# Altium PCB sai_arduinoPinMap.PcbDoc
Units mm, origin at the board's own origin, x right, y up, seen from the top; angles counter-clockwise.
Board outline 152.4 x 101.6 mm, 2 copper layers (Top Layer, Bottom Layer); 34 components, 37 nets, 136 pads, 15 vias.
Unrouted connection lines stored in the file: 1.
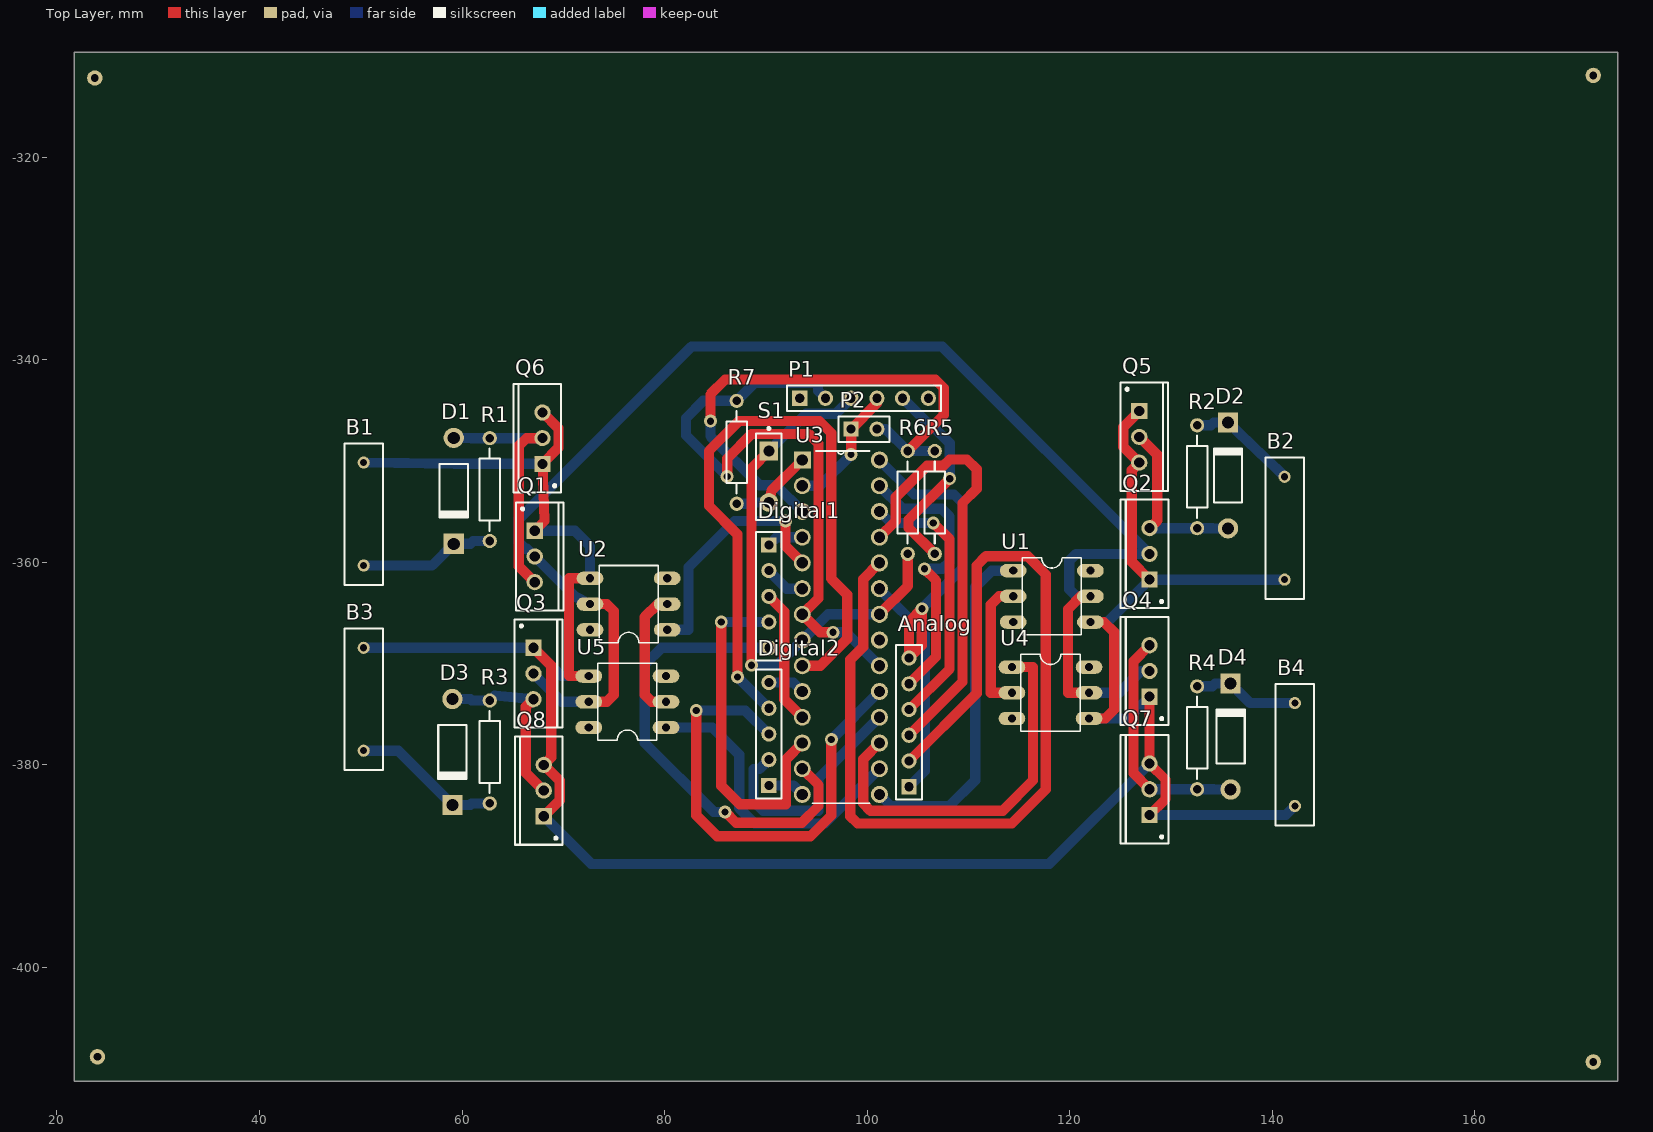
[diagram p0: Top Layer view]
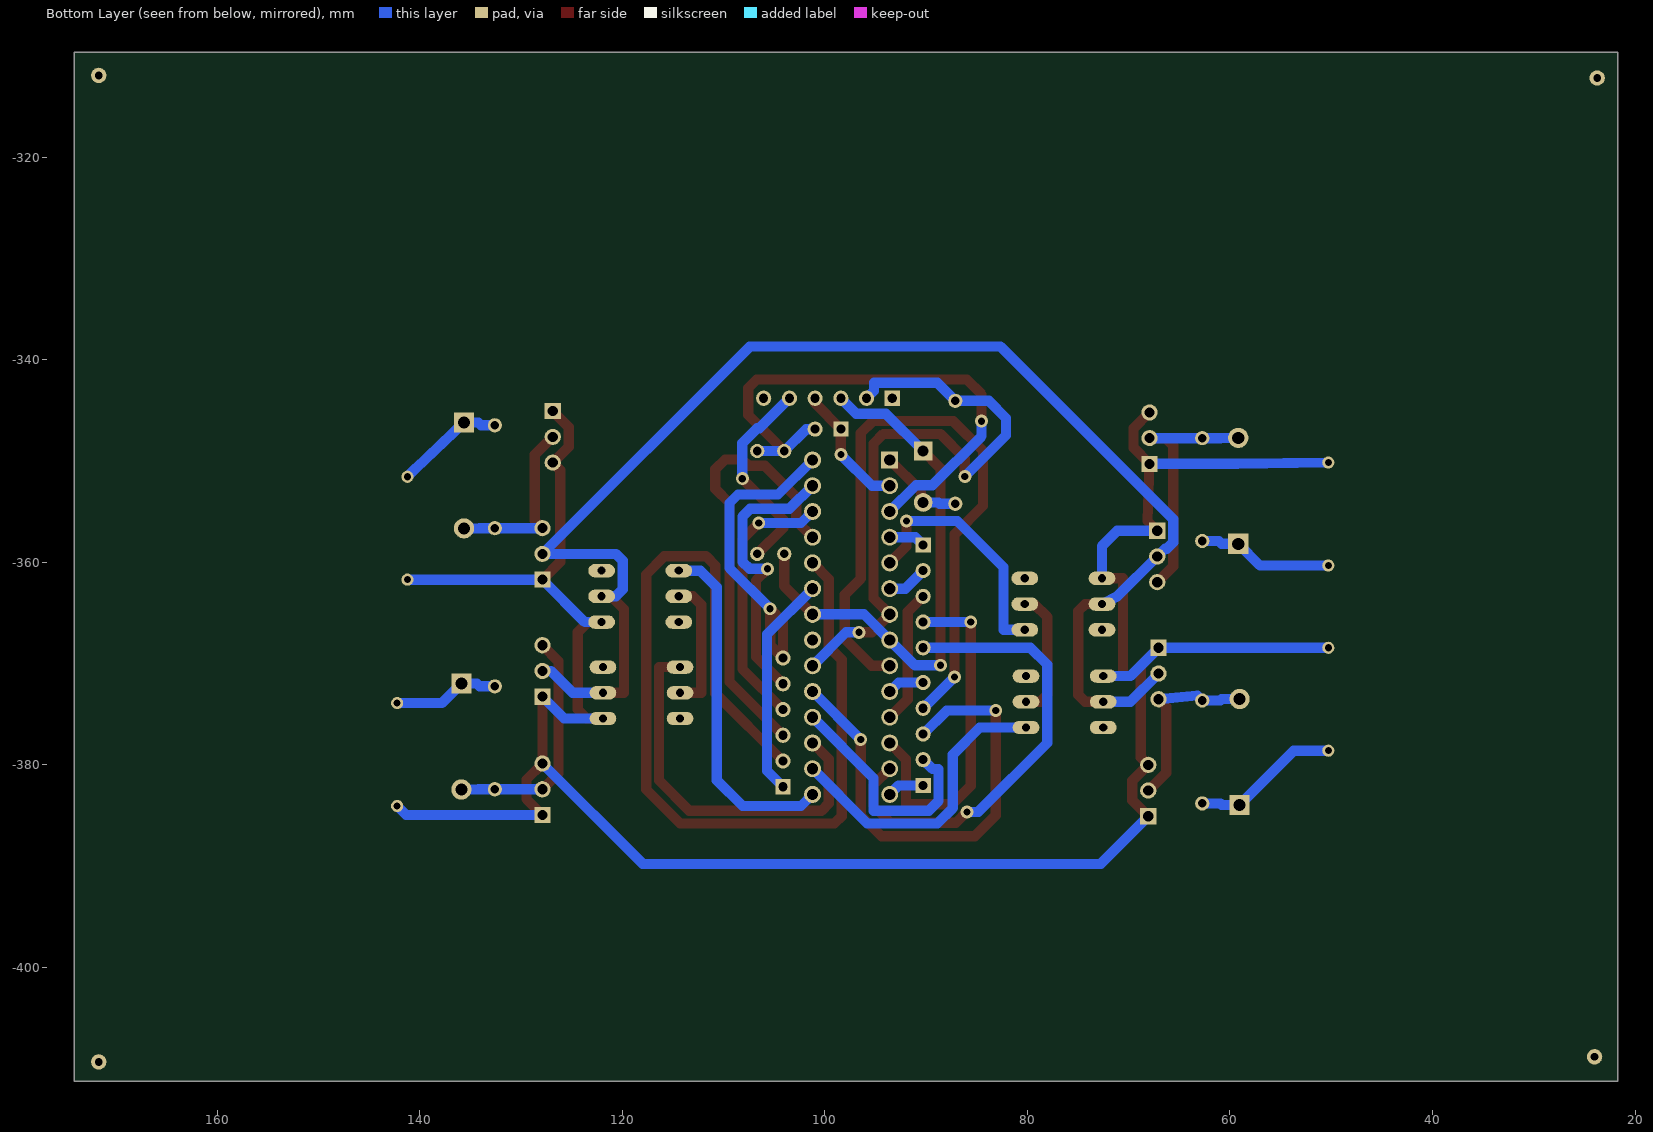
[diagram p1: Bottom Layer view, seen from below]

## Layer stack, top to bottom
Top Solder: solder mask 0.0102, Solder Resist, Dk 3.5
Top Layer: signal copper 0.0356
Dielectric 1: dielectric 0.32, FR-4, Dk 4.8
Bottom Layer: signal copper 0.0356
Bottom Solder: solder mask 0.0102, Solder Resist, Dk 3.5

## Board outline
21.717,-411.226 174.117,-411.226 174.117,-309.626 21.717,-309.626

## Design rules (kind name [scope] priority, off if disabled: settings)
Clearance [All] p1: gap=0.254 ignorepadtopadclearanceinfootprint=FALSE except(0: Arc-Hole Track-Hole SMDPad-Hole THPad-Hole Via-Hole Fill-Hole Poly-Hole Region-Hole Text-Hole)
DiffPairsRouting [All] p1: maxlimit=1 minlimit=0.5 mostfreqgap=0.75 toplayer_minwidth=1 toplayer_maxwidth=2 toplayer_prefwidth=2 bottomlayer_minwidth=1 bottomlayer_maxwidth=2 bottomlayer_prefwidth=2 maxuncoupledlength=12.7
PolygonConnect [All] p1: connectstyle=Relief reliefconductorwidth=0.254 reliefentries=4 polygonreliefangle="90 Angle" airgapwidth=0.254
RoutingVias [All] p1: holewidth=0.711 width=1.27 viastyle="Through Hole" minholewidth=0.711 minwidth=1.27 maxholewidth=0.711 maxwidth=1.27
SolderMaskExpansion [All] p1: expansion=0.102
Width [All] p1: maxlimit=1.016 minlimit=1.016 preferedwidth=1.016
29 further rules are at their usual default settings.

## Components (designator, comment, footprint, x,y, rotation, side; value= is the part's Value field where it differs from the comment)
Analog "Header 6" HDR1X6 104.14,-382.143 r90 top
B1 "Motor Servo" RAD-0.4 50.292,-355.219 r90 top
B2 "Motor Servo" RAD-0.4 141.224,-356.616 r90 top
B3 "Motor Servo" RAD-0.4 50.292,-373.507 r270 top
B4 "Motor Servo" RAD-0.4 142.24,-378.968 r270 top
D1 "Diode 1N4007" DO-41 59.182,-352.933 r270 top
D2 "Diode 1N4007" DO-41 135.636,-351.409 r90 top
D3 "Diode 1N4007" DO-41 59.055,-378.714 r270 top
D4 "Diode 1N4007" DO-41 135.89,-377.19 r90 top
Digital1 "Header 5" HDR1X5 90.297,-358.267 r270 top
Digital2 "Header 5" HDR1X5 90.297,-382.016 r90 top
P1 "Header 6" HDR1X6 93.345,-343.789 r0 top
P2 "Header 2" HDR1X2 98.425,-346.837 r0 top
Q1 "PMOS-2" TO-220AB 67.183,-359.41 r270 top
Q2 "PMOS-2" TO-220AB 127.889,-359.156 r90 top
Q3 "PMOS-2" TO-220AB 67.056,-370.967 r270 top
Q4 "PMOS-2" TO-220AB 127.889,-370.713 r90 top
Q5 "NMOS-2" TO-220AB 126.873,-347.599 r270 top
Q6 "NMOS-2" TO-220AB 67.945,-347.726 r90 top
Q7 "NMOS-2" TO-220AB 127.889,-382.397 r90 top
Q8 "NMOS-2" TO-220AB 68.072,-382.524 r90 top
R1 "Res2" AXIAL-0.4 62.738,-352.806 r90 top value=1K
R2 "Res2" AXIAL-0.4 132.588,-351.536 r90 top value=1K
R3 "Res2" AXIAL-0.4 62.738,-378.714 r90 top value=1K
R4 "Res2" AXIAL-0.4 132.588,-377.317 r90 top value=1K
R5 "Res2" AXIAL-0.4 106.68,-354.076 r270 top value=1K
R6 "Res2" AXIAL-0.4 104.013,-354.076 r90 top
R7 "Res2" AXIAL-0.4 87.122,-349.123 r90 top value=1K
S1 "SW-PB" SPST-2 90.297,-351.536 r270 top
U1 "4N35" *DIL06 118.237,-363.347 r270 top
U2 "4N35" *DIL06 76.454,-364.109 r90 top
U3 "ATMEGA328P-PU" *DIP254P762X457-28 101.219,-382.905 r0 top
U4 "4N35" *DIL06 118.11,-372.872 r270 top
U5 "4N35" *DIL06 76.327,-373.761 r90 top

## Footprints (in the part's own frame and the unit in brackets; to place one, negate y for a bottom-side part, rotate by r counter-clockwise, add the part's x,y. Pads: shape width x height; smd on the part's side, far side on the other; paste and mask are expansions set on the pad)
*DIL06 [mil]
  oval 52x104 hole 32: 1(-100,-150) 2(0,-150) 3(100,-150) 4(100,150) 5(0,150) 6(-100,150)
  silkscreen extent -150,-115 150,115
*DIP254P762X457-28 [mil]
  rect 66x66 hole 44: 1(-300,1300)
  round 66 hole 44: 2(-300,1200) 3(-300,1100) 4(-300,1000) 5(-300,900) 6(-300,800) 7(-300,700) 8(-300,600) 9(-300,500) 10(-300,400) 11(-300,300) 12(-300,200) 13(-300,100) 14(-300,0) 15(0,0) 16(0,100) 17(0,200) 18(0,300) 19(0,400) 20(0,500) 21(0,600) 22(0,700) 23(0,800) 24(0,900) 25(0,1000) 26(0,1100) 27(0,1200) 28(0,1300)
  silkscreen extent -262,-35 -38,1335
AXIAL-0.4 [mm] "Axial Device, Thru-Hole; 2 Leads; 0.4 in Pin Spacing"
  round 1.4 hole 0.85: 1(-5.08,0) 2(5.08,0)
  silkscreen extent -4.06,-1.02 4.06,1.02
DO-41 [mm] "Diode, Axial; Body 5.2 x 2.7 mm (LxDia. max), Lead Dia. 0.86 mm (max)"
  round 2 hole 1.2: 1(-5.23,0)
  rect 2x2 hole 1.2: 2(5.23,0)
  silkscreen extent -2.65,-1.4 2.75,1.4
HDR1X2 [mm] "Connector; Header; 2 Position"
  rect 1.5x1.5 hole 0.9: 1(0,0)
  round 1.5 hole 0.9: 2(2.54,0)
  silkscreen extent -1.27,-1.27 3.81,1.27
HDR1X5 [mm] "Connector; Header; 5 Position"
  rect 1.5x1.5 hole 0.9: 1(0,0)
  round 1.5 hole 0.9: 2(2.54,0) 3(5.08,0) 4(7.62,0) 5(10.16,0)
  silkscreen extent -1.27,-1.27 11.43,1.27
HDR1X6 [mm] "Connector; Header; 6 Position"
  rect 1.5x1.5 hole 0.9: 1(0,0)
  round 1.5 hole 0.9: 2(2.54,0) 3(5.08,0) 4(7.62,0) 5(10.16,0) 6(12.7,0)
  silkscreen extent -1.27,-1.27 13.97,1.27
RAD-0.4 [mm] "Radial Cap, Thru-Hole; 2 Leads; 0.4 in Pin Spacing"
  round 1.2 hole 0.7: 1(-5.08,0) 2(5.08,0)
  silkscreen extent -6.98,-1.91 6.98,1.91
SPST-2 [mm] "Switch; 2 Leads"
  rect 1.85x1.85 hole 1.1: 1(-2.54,0)
  round 1.85 hole 1.1: 2(2.54,0)
  silkscreen extent -4.89,-1.27 4.28,1.27
TO-220AB [mm] "TO, Thru-Hole, Vertical, Heatsink Mounted; 3 In-Line Leads; Pitch 2.54 mm"
  rect 1.6x1.6 hole 1: 1(-2.54,0)
  round 1.6 hole 1: 2(0,0) 3(2.54,0)
  silkscreen extent -5.35,-1.85 5.35,2.85, body extent -5.4,-1.9 5.4,2.9, height 19.3

## Part data
Analog P1: "Header, 6-Pin", LatestRevisionDate=17-Jul-2002, LatestRevisionNote="Re-released for DXP Platform.", Publisher="Altium Limited"
B1 B2 B3 B4: "Servo Motor", LatestRevisionDate=17-Jul-2002, LatestRevisionNote="Re-released for DXP Platform.", PackageDescription="Radial Cap, Thru-Hole; 2 Leads; 0.4 in Pin Spacing", PackageReference=RAD-0.4, Published=24-Mar-1999, Publisher="Altium Limited"
D1 D2 D3 D4: "1 Amp General Purpose Rectifier", Code_JEDEC=DO-204-AL, ComponentLink1Description="Manufacturer Link", ComponentLink1URL=http://www.fairchildsemi.com/, ComponentLink2Description=Datasheet, ComponentLink2URL=http://www.fairchildsemi.com/ds/1N%2F1N4001.pdf, DatasheetVersion=1998, LatestRevisionDate=17-Jul-2002, LatestRevisionNote="Re-released for DXP Platform.", PackageDescription="Diode, Axial; Body 5.2 x 2.7 mm (LxDia. max), Lead Dia. 0.86 mm (max)", PackageReference=DO-41, PackageVersion=Aug-1999, Published=8-Jun-2000, Publisher="Altium Limited"
Digital1 Digital2: "Header, 5-Pin", LatestRevisionDate=17-Jul-2002, LatestRevisionNote="Re-released for DXP Platform.", Publisher="Altium Limited"
P2: "Header, 2-Pin", LatestRevisionDate=17-Jul-2002, LatestRevisionNote="Re-released for DXP Platform.", Publisher="Altium Limited"
Q1 Q2 Q3 Q4: "P-Channel Power MOSFET", ComponentLink1Description="Manufacturer Link", ComponentLink1URL=http://www.irf.com/, DatasheetVersion=PD-9.390D, LatestRevisionDate=17-Jul-2002, LatestRevisionNote="Re-released for DXP Platform.", Note="Pin 4 not drawn and electrically connected to Pin 2.", PackageDescription="TO, Thru-Hole, Vertical, Heatsink Mounted; 3 In-Line Leads; Pitch 2.54 mm", PackageReference=TO-220AB, PackageVersion=Feb-1997, Published=8-Jun-2000, Publisher="Altium Limited"
Q5 Q6 Q7 Q8: "N-Channel Power MOSFET", ComponentLink1Description="Manufacturer Link", ComponentLink1URL=http://www.irf.com/, DatasheetVersion=PD-9.814, LatestRevisionDate=17-Jul-2002, LatestRevisionNote="Re-released for DXP Platform.", Note="Pin 2 is electrically connected to pin 4.", PackageDescription="TO, Thru-Hole, Vertical, Heatsink Mounted; 3 In-Line Leads; Pitch 2.54 mm", PackageReference=TO-220AB, PackageVersion=Feb-1997, Published=8-Jun-2000, Publisher="Altium Limited"
R1 R2 R3 R4 R5 R6 R7: "Resistor", LatestRevisionDate=17-Jul-2002, LatestRevisionNote="Re-released for DXP Platform.", PackageDescription="Axial Device, Thru-Hole; 2 Leads; 0.4 in Pin Spacing", PackageReference=AXIAL-0.4, Published=8-Jun-2000, Publisher="Altium Limited"
S1: "Switch", LatestRevisionDate=17-Jul-2002, LatestRevisionNote="Re-released for DXP Platform.", PackageDescription="Switch; 2 Leads", PackageReference=SPST-2, Published=24-Mar-1999, Publisher="Altium Limited"
U1 U2 U4 U5: "Optoisolator; Analog; 6-Pin DIP; Transistor; 6 PIN SINGLE; 100% CTR;", Package="DIP-6 Infineon", Availability=Unavailable, MF="Vishay Semiconductor", MP=4N35, Price=None, SnapEDA_Link=https://www.snapeda.com/parts/4N35/Vishay%20Semiconductor%20Opto%20Division/view-part/?ref=snap
U3: "Embedded microcontroller ATMEGA328P-PU PDIP 28 Microchip Technology 8-Bit 20 MHz I/O number 23", Package="PDIP-28 Microchip", Availability=Unavailable, MF=Microchip, MP=ATMEGA328P-PU, Price=None, SnapEDA_Link=https://www.snapeda.com/parts/ATMEGA328P-PU/Microchip/view-part/?ref=snap

## Free pads (board coordinates)
  round 1.524 hole 0.762: 1(23.749,-312.166) 2(171.704,-311.912) 3(171.704,-409.321) 4(24.003,-408.813)

## Via types
v1: diameter 1.27, hole 0.711, Top Layer to Bottom Layer, 15 vias

## Nets (pads, with @x,y where several pads share a name; then routed paths per layer and width w, separated by ;. In a path a pad name is that pad's centre, name@x,y a point inside that pad or via, vN(x,y) a via of type N, cw(c..) or ccw(c..) an arc to the next point about the centre after c; other vN are vias at no path point)
NetAnalog_1: Analog.1 U3.23 | length 22.1
  Bottom Layer w1.016: U3.23 105.715,-367.081 105.715,-380.568 Analog.1
NetAnalog_2: Analog.2 U3.24 | length 98.5
  Top Layer w1.016: U3.24 99.619,-361.645 99.619,-368.325 98.349,-369.595 98.349,-385.064 99.06,-385.775 114.3,-385.775 117.653,-382.422 117.653,-361.188 115.849,-359.385 111.735,-359.385 110.82,-360.299 110.82,-372.923 Analog.2
NetAnalog_3: Analog.3 U3.25 | length 43.6
  Top Layer w1.016: U3.25 102.819,-355.905 102.819,-353.568 105.929,-350.458 107.529,-350.458 108.153,-349.834 109.855,-349.834 110.82,-350.799 110.82,-352.73 109.423,-354.127 109.423,-371.78 Analog.3
NetAnalog_4: Analog.4 U3.26 | length 26.5
  Top Layer w1.016: Analog.4 108.142,-370.521 108.142,-357.722 v1(106.528,-356.108)
  Bottom Layer w1.016: U3.26 102.362,-356.108 v1(106.528,-356.108)
NetAnalog_5: Analog.5 U3.27 | length 28.3
  Top Layer w1.016: Analog.5 106.807,-369.316 106.807,-361.772 v1(105.664,-360.629)
  Bottom Layer w1.016: U3.27 103.505,-354.711 107.38,-354.711 108.142,-355.473 108.142,-359.918 107.431,-360.629 v1(105.664,-360.629)
NetAnalog_6: Analog.6 U3.28 | length 32.9
  Top Layer w1.016: Analog.6 104.14,-365.836 v1(105.41,-364.566) 105.41,-368.173 Analog.6
  Bottom Layer w1.016: U3.28 104.628,-353.294 108.585,-353.294 109.423,-354.132 109.423,-360.553 v1(105.41,-364.566)
NetB1_1: B1.1 D1.2 R1.1 | length 13.4
  Bottom Layer w1.016: B1.1 57.046,-360.299 D1.2 60.808,-358.163 61.085,-357.886 R1.1
NetB1_2: B1.2 B2.1 B3.1 B4.2 Q1.1 Q2.1 Q3.1 Q4.1 Q5.1 Q5.3 Q6.1 Q6.3 Q7.1 Q7.3 Q8.1 Q8.3 U1.4 U2.4 U4.4 U5.4 | length 250
  Top Layer w1.016: Q3.1 68.821,-370.192 68.821,-379.235 Q8.3 69.647,-381.559 69.647,-383.489 Q8.1 ; Q1.1 68.148,-355.905 Q6.1 69.52,-348.691 69.52,-346.761 Q6.3 ; U5.4 70.561,-371.221 70.561,-361.569 U2.4 ; U4.4 123.52,-375.412 124.409,-374.523 124.409,-366.903 123.393,-365.887 U1.4 ; Q5.1 125.298,-346.634 125.298,-348.564 Q5.3 126.124,-350.888 126.124,-359.931 Q2.1 ; Q7.1 129.464,-383.362 129.464,-381.432 Q7.3 Q4.1
  Bottom Layer w1.016: B3.1 Q3.1 69.85,-371.221 U5.4 ; B1.2 59.258,-350.266 Q6.1 ; Q1.1 71.12,-356.87 72.644,-358.394 U2.4 ; Q8.1 72.776,-389.768 117.978,-389.768 Q7.3 ; U4.4 125.73,-375.412 Q4.1 ; U1.4 123.698,-365.887 Q2.1 B2.1 ; Q7.1 141.351,-384.937 B4.2
NetB2_2: B2.2 D2.2 R2.2 | length 10.9
  Bottom Layer w1.016: R2.2 133.96,-346.456 134.237,-346.179 D2.2 140.437,-350.749 B2.2
NetB3_2: B3.2 D3.2 R3.1 | length 14.7
  Bottom Layer w1.016: B3.2 53.698,-378.587 D3.2 60.808,-383.944 60.958,-383.794 R3.1
NetB4_1: B4.1 D4.2 R4.2 | length 10.6
  Bottom Layer w1.016: R4.2 134.087,-372.237 134.364,-371.96 D4.2 137.818,-373.888 B4.1
NetD1_1: D1.1 Q1.3 Q6.2 R1.2 | length 25.5
  Top Layer w1.016: Q1.3 65.608,-360.375 65.608,-348.488 66.37,-347.726 Q6.2
  Bottom Layer w1.016: D1.1 60.935,-347.703 60.958,-347.726 R1.2 Q6.2
NetD2_1: D2.1 Q2.3 Q5.2 R2.1 | length 17.8
  Top Layer w1.016: Q5.2 128.638,-349.364 128.638,-355.867 Q2.3
  Bottom Layer w1.016: Q2.3 R2.1 134.087,-356.616 134.11,-356.639 D2.1
NetD3_1: D3.1 Q3.3 Q8.2 R3.2 | length 18.3
  Top Layer w1.016: Q3.3 66.307,-374.256 66.307,-380.759 Q8.2
  Bottom Layer w1.016: D3.1 60.808,-373.484 60.958,-373.634 R3.2 63.233,-373.139 Q3.3
NetD4_1: D4.1 Q4.3 Q7.2 R4.1 | length 23.5
  Top Layer w1.016: Q7.2 126.314,-380.822 126.314,-369.748 Q4.3
  Bottom Layer w1.016: Q7.2 R4.1 134.214,-382.397 134.237,-382.42 D4.1
NetDigital1_1: Digital1.1 U3.4 | length 3.6
  Bottom Layer w1.016: Digital1.1 91.059,-357.505 U3.4
NetDigital1_2: Digital1.2 U3.6 | length 4
  Bottom Layer w1.016: Digital1.2 92.075,-362.585 U3.6
NetDigital1_3: Digital1.3 U3.11 | length 13.3
  Top Layer w1.016: Digital1.3 91.821,-364.871 91.821,-373.507 U3.11
NetDigital1_4: Digital1.4 U3.12 | length 34.7
  Top Layer w1.016: v1(85.598,-365.887) 85.598,-382.041 87.427,-383.87 91.999,-383.87 91.999,-379.425 U3.12
  Bottom Layer w1.016: v1(85.598,-365.887) Digital1.4
NetDigital1_5: Digital1.5 U3.13 | length 46.1
  Top Layer w1.016: v1(85.979,-384.632) 87.052,-385.705 93.542,-385.705 95.199,-384.048 95.199,-381.965 U3.13
  Bottom Layer w1.016: v1(85.979,-384.632) 84.861,-384.632 78.054,-377.825 78.054,-370.078 79.705,-368.427 Digital1.5
NetDigital2_1: Digital2.1 U3.14 | length 3.7
  Bottom Layer w1.016: Digital2.1 92.71,-382.016 U3.14
NetDigital2_2: Digital2.2 U3.18 | length 23.6
  Bottom Layer w1.016: Digital2.2 89.383,-380.39 88.773,-380.39 88.773,-383.54 89.738,-384.505 95.199,-384.505 95.199,-381.305 U3.18
NetDigital2_3: Digital2.3 U3.19 | length 47.7
  Top Layer w1.016: v1(83.134,-374.625) 83.134,-384.962 85.217,-387.045 94.412,-387.045 96.469,-384.988 v1(96.469,-377.495)
  Bottom Layer w1.016: v1(83.134,-374.625) 87.986,-374.625 Digital2.3 ; v1(96.469,-377.495) U3.19
NetDigital2_4: Digital2.4 U3.9 | length 68.2
  Top Layer w1.016: v1(87.198,-371.297) 87.198,-357.226 84.39,-354.417 84.39,-348.989 87.34,-346.039 95.29,-346.039 96.469,-347.218 96.469,-361.594 98.044,-363.169 98.044,-367.538 95.377,-370.205 U3.9
  Bottom Layer w1.016: v1(87.198,-371.297) Digital2.4
NetDigital2_5: Digital2.5 U3.10 | length 3.7
  Bottom Layer w1.016: Digital2.5 92.71,-371.856 U3.10
NetP1_2: P1.2 R7.2 U3.7 U3.20 | length 63.2
  Top Layer w1.016: v1(86.182,-351.511) 86.182,-349.737 88.61,-347.309 94.223,-347.309 95.199,-348.285 95.199,-363.525 U3.7 95.374,-366.9 v1(96.634,-366.9)
  Bottom Layer w1.016: v1(86.182,-351.511) 82.118,-347.447 82.118,-345.745 83.82,-344.043 R7.2 88.9,-342.265 95.148,-342.265 95.148,-343.052 P1.2 ; v1(96.634,-366.9) 97.914,-366.9 U3.20
NetP1_3: P1.3 R6.1 S1.1 U3.8 U3.22 | length 54
  Top Layer w1.016: v1(88.595,-370.154) 88.595,-350.698 S1.1 ; U3.22 104.013,-362.331 R6.1
  Bottom Layer w1.016: v1(88.595,-370.154) 91.11,-370.154 U3.8 96.139,-365.125 U3.22 ; S1.1 93.98,-345.313 96.901,-345.313 P1.3
NetP1_4: P1.4 P2.1 U3.2 | length 12.7
  Top Layer w1.016: v1(98.425,-349.352) P2.1 100.965,-344.297 P1.4
  Bottom Layer w1.016: U3.2 95.352,-352.425 v1(98.425,-349.352)
NetP1_5: P1.5 R5.2 | length 20.2
  Top Layer w1.016: R5.2 104.089,-356.565 104.089,-355.792 v1(108.153,-351.728)
  Bottom Layer w1.016: P1.5 106.477,-346.761 106.68,-346.761 108.153,-348.234 v1(108.153,-351.728)
NetP2_2: P2.2 R5.1 R6.2 U3.3 | length 54.6
  Top Layer w1.016: v1(84.531,-346.05) 84.531,-343.408 86.004,-341.935 106.731,-341.935 107.569,-342.773 107.569,-345.44 R6.2
  Bottom Layer w1.016: v1(84.531,-346.05) 84.531,-347.523 89.383,-352.374 91.008,-352.374 U3.3 ; P2.2 101.854,-346.837 R6.2 R5.1
NetQ1_2: Q1.2 Q2.2 Q3.2 Q4.2 U1.5 U2.5 U4.5 U5.5 | length 143.1
  Top Layer w1.016: U5.5 74.295,-373.761 74.981,-373.075 74.981,-364.795 74.295,-364.109 U2.5 ; U4.5 119.837,-372.872 119.837,-364.617 121.107,-363.347 U1.5
  Bottom Layer w1.016: Q3.2 69.85,-373.761 U5.5 ; U2.5 71.12,-363.347 Q1.2 66.421,-358.648 66.243,-358.648 65.608,-358.013 65.608,-355.727 82.652,-338.684 107.417,-338.684 Q2.2 120.65,-359.156 119.964,-359.842 119.964,-362.661 120.65,-363.347 U1.5 ; U4.5 124.892,-372.872 127.051,-370.713 Q4.2
NetR7_1: R7.1 S1.2 U3.1 | length 8.7
  Top Layer w1.016: S1.2 90.551,-352.933 U3.1
  Bottom Layer w1.016: R7.1 88.646,-354.203 88.773,-354.076 S1.2
NetU1_1: U1.1 U3.15 | length 34.5
  Bottom Layer w1.016: U3.15 102.362,-384.048 108.128,-384.048 110.668,-381.508 110.668,-362.458 112.319,-360.807 U1.1
NetU1_2: U1.2 U2.2 U4.2 U5.2 | length 26.1
  Top Layer w1.016: U5.2 78.74,-373.761 78.054,-373.075 78.054,-365.379 79.324,-364.109 U2.2 ; U4.2 112.217,-372.872 112.217,-364.16 113.03,-363.347 U1.2
NetU2_1: U2.1 U3.5 | length 24.6
  Top Layer w1.016: v1(91.948,-355.905) 91.948,-358.394 U3.5
  Bottom Layer w1.016: U2.1 82.372,-366.649 82.372,-360.451 86.919,-355.905 v1(91.948,-355.905)
NetU3_16: U3.16 U5.1 | length 30.3
  Bottom Layer w1.016: U5.1 84.709,-376.301 87.376,-378.968 87.376,-384.251 88.9,-385.775 95.809,-385.775 U3.16
NetU3_17: U3.17 U4.1 | length 38.2
  Top Layer w1.016: U3.17 99.619,-379.425 99.619,-383.794 100.33,-384.505 113.386,-384.505 116.383,-381.508 116.383,-370.332 U4.1
pads on no net: P1.1 P1.6 U1.3 U1.6 U2.3 U2.6 U3.21 U4.3 U4.6 U5.3 U5.6